# Altium PCB LKS_Motor_0331.PcbDoc (part 1 of 3)
Units mm, origin at the board's own origin, x right, y up, seen from the top; angles counter-clockwise.
Board outline 117 x 10 mm, 2 copper layers (Top Layer, Bottom Layer); 110 components, 71 nets, 323 pads, 187 vias.
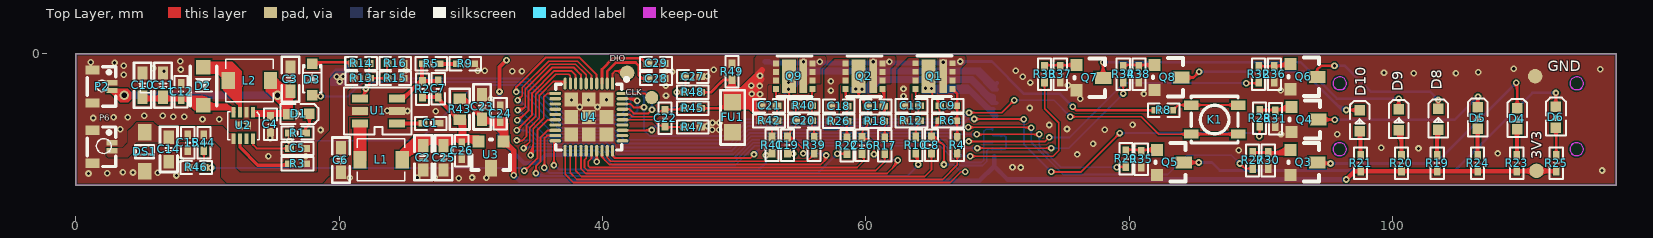
[diagram p0: Top Layer view]
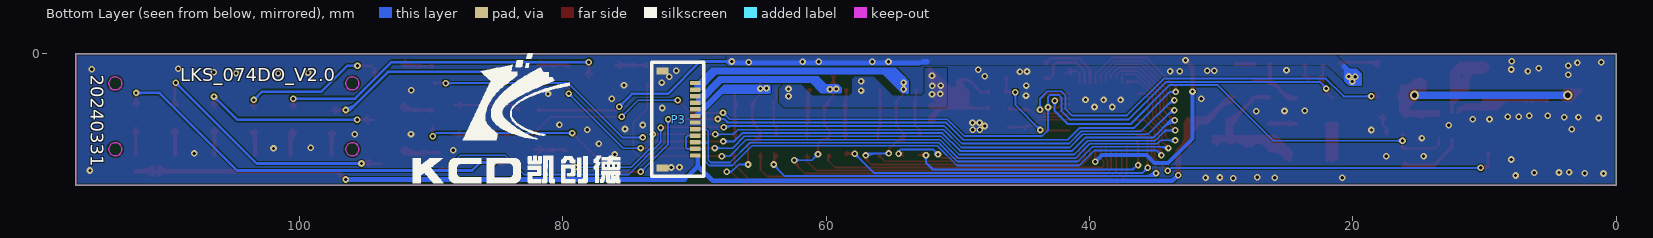
[diagram p1: Bottom Layer view, seen from below]
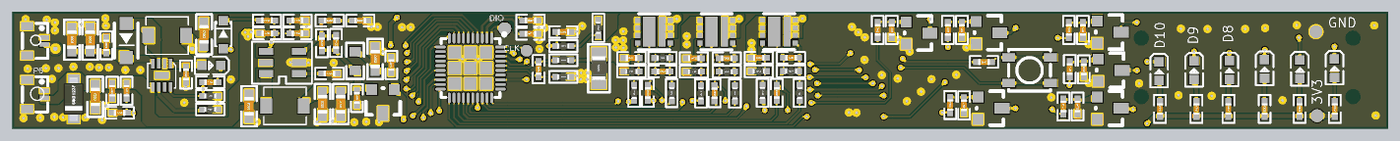
[diagram p4: 3D render of the assembled board from above, using the file's embedded part models]

## Layer stack, top to bottom
Top Solder: solder mask 0.0102, Solder Resist, Dk 3.5
Top Layer: signal copper 0.0356
Dielectric1: core 0.32, FR-4, Dk 4.8
Bottom Layer: signal copper 0.0356
Bottom Solder: solder mask 0.0102, Solder Resist, Dk 3.5

## Board outline
0,-10 0,0 117,0 117,-10

## Design rules (kind name [scope] priority, off if disabled: settings)
Clearance [All] p1: gap=0.1 ignorepadtopadclearanceinfootprint=FALSE except(0: Arc-Hole Track-Hole SMDPad-Hole THPad-Hole Via-Hole Fill-Hole Poly-Hole Region-Hole Text-Hole)
ComponentClearance [All] p1 off: gap=0.254 collisioncheckmode=3 verticalgap=0.254 showdistances=FALSE
FabricationTestpoint [(IsPad And (OnTopLayer Or OnBottomLayer))] p1: side=3 testpointundercomponent=TRUE minsize=1.016 maxsize=2.54 preferedsize=1.524 minholesize=0 maxholesize=1.016 preferedholesize=0.813 testpointgrid=0.025 allowsidetop=TRUE allowsidebottom=TRUE usegrid=TRUE gridtolerance=0
HoleSize [All] p1: absolutevalues=TRUE maxlimit=5.08 minlimit=0.025 maxpercent=80.000 minpercent=20.000
HoleToHoleClearance [All] p1: gap=0.127 allowstackedmicrovias=TRUE
MinimumSolderMaskSliver [All] p1 off: minsoldermaskwidth=0.127
PlaneClearance [All] p1: clearance=0.178
PlaneConnect [All] p1: planeconnectstyle=Direct reliefexpansion=0.508 reliefentries=4 reliefconductorwidth=0.254 reliefairgap=0.254
PolygonConnect [All] p1: connectstyle=Direct reliefconductorwidth=0.254 reliefentries=4 polygonreliefangle="90 Angle" airgapwidth=0.254
RoutingVias [All] p1: holewidth=0.457 width=0.762 viastyle="Through Hole" minholewidth=0.2 minwidth=0.5 maxholewidth=1 maxwidth=2
SilkToSilkClearance [All] p1 off: silktosilkclearance=0
SilkToSolderMaskClearance SilkscreenOverComponentPads [IsPad] p1 off: minsilkscreentomaskgap=0.127 clearancetoexposedcopper=TRUE
SolderMaskExpansion [All] p1: expansion=0.102 istentingtop=FALSE
Width [All] p1: maxlimit=2.54 minlimit=0.127 preferedwidth=0.203
21 further rules are at their usual default settings.

## Components (designator, comment, footprint, x,y, rotation, side; value= is the part's Value field where it differs from the comment)
3V3 "test" piot#1 110.947,-8.89 r0 top
C1 "1uF/16V" "C 0402_M" 26.975,-5.283 r180 top
C2 "10uF/16V" "C 0603_M" 26.391,-7.899 r90 top
C3 "22uF/25V" "C 0603_M" 16.307,-1.93 r270 top
C4 "1uF/25V" "C 0402_M" 14.783,-5.359 r270 top
C5 "103" "R 0402_M" 16.84,-7.188 r180 top
C6 "10uF/16V" "C 0603_M" 20.142,-8.077 r90 top
C7 "10pF/16V" "C 0402_M" 27.534,-2.667 r270 top
C8 "4.7uF/25V" "C 0402_M" 64.999,-6.934 r270 top
C9 "1nF" "C 0402_M" 66.221,-3.943 r0 top
C10 "22uF/25V" "C 0603_M" 5.08,-2.388 r270 top
C11 "22uF/25V" "C 0603_M" 6.629,-2.388 r270 top
C12 "4.7uF/25V" "C 0402_M" 8.001,-2.87 r270 top
C13 "1nF" "C 0402_M" 63.475,-3.943 r0 top
C14 "22uF/25V" "C 0603_M" 7.061,-7.264 r90 top
C15 "1uF/25V" "C 0402_M" 8.509,-6.756 r90 top
C16 "4.7uF/25V" "C 0402_M" 59.715,-6.96 r270 top
C17 "1nF" "C 0402_M" 60.755,-3.978 r0 top
C18 "1nF" "C 0402_M" 57.961,-3.978 r0 top
C19 "4.7uF/25V" "C 0402_M" 54.051,-6.934 r270 top
C20 "1nF" "C 0402_M" 55.294,-5.096 r0 top
C21 "1nF" "C 0402_M" 52.653,-3.953 r0 top
C22 "NC" "C 0402_M" 44.755,-4.902 r90 top
C23 "10uF/10V" "C 0603_M" 30.861,-4.039 r270 top
C24 "100nF" "C 0402_M" 32.233,-4.547 r90 top
C25 "10uF/10V" "C 0603_M" 27.94,-7.899 r90 top
C26 "100nF/10V" "C 0402_M" 29.312,-7.366 r270 top
C27 "1nF/50V" "C 0402_M" 46.863,-1.727 r180 top
C28 "100nF/50V" "C 0402_M" 44.069,-1.88 r0 top
C29 "1uF/10V" "C 0402_M" 44.069,-0.737 r180 top
CLK "test" piot#2 43.739,-3.327 r0 top
D1 "LED_R" 0603-LED 17.018,-4.648 r180 top
D2 "SS34" SOD123FL 9.703,-2.235 r270 top
D3 "4148" SOD-323 17.958,-1.956 r270 top
D4 "LED_R" 0603-LED 109.55,-4.851 r270 top
D5 "LED_R" 0603-LED 106.553,-4.801 r270 top
D6 "LED_R" 0603-LED 112.497,-4.75 r270 top
D8 "LED_R" 0603-LED 103.556,-4.902 r270 top
D9 "LED_R" 0603-LED 100.559,-4.928 r270 top
D10 "LED_R" 0603-LED 97.587,-5.004 r270 top
DIO "test" piot#1 41.885,-1.448 r0 top
DS1 "SMF12CA-MS" SOD-123F 5.232,-7.442 r90 top
FU1 "0.05R" "R 0805_M" 49.886,-4.826 r90 top
GND "test" piot#1 110.846,-1.702 r0 top
K1 "K1" SMD3.3X3.3X2 86.5,-5 r0 top
L1 "6.8uH" "SMD3.5X3 .2- duplicate" 23.19,-8.052 r0 top
L2 "4.7uH" "SMD3.5X3 .2- duplicate" 13.183,-2.032 r0 top
P2 "Header 2" CONN_SMD_2P_0.6 1.88,-2.515 r270 top
P3 "Header 12" SMD-12 69.952,-7.722 r90 bottom
P6 "Header 2" CONN_SMD_2P_0.6 1.88,-7.087 r270 top
Q1 "CJBM3020" DFN-3X3_8 66.577,-2.672 r90 top
Q2 "CJBM3020" DFN-3X3_8 61.263,-2.681 r90 top
Q3 "J3Y" SOT-23 92.253,-7.29 r270 top
Q4 "J3Y" SOT-23 92.329,-4.039 r270 top
Q5 "J3Y" SOT-23 82.118,-7.29 r270 top
Q6 "J3Y" SOT-23 92.253,-0.787 r270 top
Q7 "J3Y" SOT-23 75.997,-0.864 r270 top
Q8 "J3Y" SOT-23 81.94,-0.838 r270 top
Q9 "CJBM3020" DFN-3X3_8 55.955,-2.681 r90 top
R1 "4.7K" "C 0402_M" 16.84,-6.02 r0 top
R2 "2.5M" "C 0402_M" 26.34,-2.692 r90 top
R3 "510" "R 0402_M" 16.84,-8.357 r0 top
R4 "10R" "R 0402_M" 66.953,-6.94 r270 top
R5 "340K" "C 0402_M" 27,-0.762 r0 top
R6 "10K" "R 0402_M" 66.221,-5.086 r180 top
R8 "200K" "C 0402_M" 82.626,-4.293 r180 top
R9 "0" "C 0402_M" 29.591,-0.762 r0 top
R10 "10R" "R 0402_M" 63.805,-6.934 r270 top
R12 "10K" "R 0402_M" 63.475,-5.086 r180 top
R13 "1.5M/NC" "C 0402_M" 21.692,-1.854 r0 top
R14 "1K" "C 0402_M" 21.666,-0.737 r0 top
R15 "100K" "C 0402_M" 24.257,-1.854 r180 top
R16 "100K" "C 0402_M" 24.257,-0.737 r0 top
R17 "10R" "R 0402_M" 61.443,-6.975 r270 top
R18 "10K" "R 0402_M" 60.755,-5.121 r180 top
R19 "1K" "C 0402_M" 103.403,-8.306 r270 top
R20 "1K" "C 0402_M" 100.686,-8.306 r270 top
R21 "1K" "C 0402_M" 97.587,-8.306 r270 top
R22 "10R" "R 0402_M" 58.571,-6.975 r270 top
R23 "1K" "C 0402_M" 109.449,-8.306 r270 top
R24 "1K" "C 0402_M" 106.477,-8.306 r270 top
R25 "1K" "C 0402_M" 112.446,-8.306 r270 top
R26 "10K" "R 0402_M" 57.961,-5.121 r180 top
R27 "10K" "C 0402_M" 89.383,-8.103 r270 top
R28 "10K" "C 0402_M" 89.916,-4.902 r270 top
R29 "10K" "C 0402_M" 79.756,-7.976 r270 top
R30 "100K" "C 0402_M" 90.576,-8.103 r270 top
R31 "100K" "C 0402_M" 91.11,-4.928 r270 top
R32 "10K" "C 0402_M" 89.84,-1.549 r270 top
R33 "10K" "C 0402_M" 73.584,-1.549 r270 top
R34 "10K" "C 0402_M" 79.553,-1.549 r270 top
R35 "100K" "C 0402_M" 80.924,-8.001 r270 top
R36 "100K" "C 0402_M" 91.034,-1.549 r270 top
R37 "100K" "C 0402_M" 74.778,-1.549 r270 top
R38 "100K" "C 0402_M" 80.747,-1.549 r270 top
R39 "10R" "R 0402_M" 56.082,-6.95 r270 top
R40 "10K" "R 0402_M" 55.294,-3.953 r180 top
R41 "10R" "R 0402_M" 52.883,-6.934 r270 top
R42 "10K" "R 0402_M" 52.653,-5.096 r180 top
R43 "0R/NC" 0603 29.159,-4.216 r90 top
R44 "2M" "C 0402_M" 9.728,-6.756 r270 top
R45 "1K1%" "R 0402_M" 46.863,-4.14 r180 top
R46 "470K" "C 0402_M" 9.144,-8.636 r180 top
R47 "1K1%" "R 0402_M" 46.863,-5.563 r180 top
R48 "1K" "R 0402_M" 46.863,-2.921 r180 top
R49 "10R" "R 0402_M" 49.835,-1.372 r90 top
U1 "CS5503R" SOT23-6L 23.038,-4.394 r180 top
U2 "CS5090EL" DFN2X2_8_0.5 12.725,-5.436 r180 top
U3 "CJ6376A33MY" SOT-23 32.487,-6.655 r180 top
U4 "LKS32MC074DOF8Q8" QFN40 38.989,-4.801 r270 top

## Footprints (in the part's own frame and the unit in brackets; to place one, negate y for a bottom-side part, rotate by r counter-clockwise, add the part's x,y. Pads: shape width x height; smd on the part's side, far side on the other; paste and mask are expansions set on the pad)
0603 [mm]
  rect 0.8x0.955 smd: 1(-0.795,0) 2(0.795,0)
  silkscreen extent -1.53,-0.75 1.56,0.75
0603-LED [mm]
  rect 0.8x0.8 smd: 1(0.876,-0.073) 2(-0.723,-0.08)
  silkscreen extent -1.41,-0.82 1.47,0.68
"C 0402_M" [mil] "无极性贴片电容"
  rect 26x20 smd: 1(-24,0) 2(24,0)
  silkscreen extent -47,-20 47,20, body extent -20,-10 20,10, height 21
"C 0603_M" [mil] "无极性贴片电容"
  rect 40x30 smd: 1(-36.5,0) 2(36.5,0)
  silkscreen extent -68,-26 68,26, body extent -31,-16 31,16, height 32
CONN_SMD_2P_0.6 [mm]
  rect 0.4x0.8 smd: 1(-0.324,0.871) 2(0.276,0.871)
  rect 0.7x1.05 smd: 3(1.226,-0.604) 4(-1.274,-0.604)
  silkscreen extent -1.52,-1.01 1.48,1.15
DFN2X2_8_0.5 [mm]
  rect 0.3x0.8 smd: 1(-0.75,-1) 2(-0.25,-1) 3(0.25,-1) 4(0.75,-1) 5(0.75,1) 6(0.25,1) 7(-0.25,1) 8(-0.75,1)
  rect 1.2x0.6 smd: 9(0,0)
  silkscreen extent -1.19,-1.02 1.2,1.08
DFN-3X3_8 [mil]
  rect 17x18 smd: 1(0,0) 2(25.59,0) 3(51.18,0) 4(76.77,0) 5(76.77,109.58) 6(51.18,109.58) 7(25.59,109.58) 8(0,109.58)
  rect 100x23 smd: 9(38.33,27.5)
  rect 100x42 smd: 10(38.33,70.83)
  silkscreen extent -23,2 99,106
piot#1 [mm]
  round 1.1 smd: 1(0,0)
piot#2 [mm]
  round 1 smd: 1(0,0)
QFN40 [mm]
  rect 1.05x1.05 smd: 0(-1.32,-1.352) 0(-1.32,1.308) 0(-1.32,-0.022) 0(0.01,-0.022) 0(0.01,1.308) 0(0.01,-1.352) 0(1.34,-0.022) 0(1.34,-1.352) 0(1.34,1.308)
  rect 0.9x0.24 smd: 1(-2.54,1.778)
  oval 0.9x0.24 smd: 2(-2.54,1.378) 3(-2.54,0.978) 4(-2.54,0.578) 5(-2.54,0.178) 6(-2.54,-0.222) 7(-2.54,-0.622) 8(-2.54,-1.022) 9(-2.54,-1.422) 10(-2.54,-1.822) 21(2.56,-1.822) 22(2.56,-1.422) 23(2.56,-1.022) 24(2.56,-0.622) 25(2.56,-0.222) 26(2.56,0.178) 27(2.56,0.578) 28(2.56,0.978) 29(2.56,1.378) 30(2.56,1.778)
  oval 0.24x0.9 smd: 11(-1.79,-2.572) 12(-1.39,-2.572) 13(-0.99,-2.572) 14(-0.59,-2.572) 15(-0.19,-2.572) 16(0.21,-2.572) 17(0.61,-2.572) 18(1.01,-2.572) 19(1.41,-2.572) 20(1.81,-2.572) 31(1.81,2.528) 32(1.41,2.528) 33(1.01,2.528) 34(0.61,2.528) 35(0.21,2.528) 36(-0.19,2.528) 37(-0.59,2.528) 38(-0.99,2.528) 39(-1.39,2.528) 40(-1.79,2.528)
  silkscreen extent -2.98,-2.52 2.51,2.97
"R 0402_M" [mil] "1/16W贴片电阻"
  rect 26x20 smd: 1(-24,0) 2(24,0)
  silkscreen extent -47,-20 47,20, body extent -20,-10 20,10, height 12
"R 0805_M" [mil] "1/8W贴片电阻"
  rect 50x50 smd: 1(-45,0) 2(45,0)
  silkscreen extent -81,-36 81,36, body extent -39,-25 39,25, height 20
SMD3.3X3.3X2 [mm]
  rect 1.1x0.7 smd: 1(-1.775,1.1) 1(1.775,1.1) 2(-1.775,-1.1) 2(1.775,-1.1)
  silkscreen extent -1.78,-1.78 1.78,1.78
"SMD3.5X3 .2- duplicate" [mm]
  rect 1x1.3 smd: 1(-1.6,0) 2(1.6,0)
  silkscreen extent -1.8,-1.6 1.8,1.6
SMD-12 [mil]
  rect 22x36 smd: 0(252.38,97.5) 0/2(-37.62,97.5)
  rect 13x32 smd: 1(216.53,0) 2(196.85,0) 3(177.17,0) 4(157.48,0) 5(137.79,0) 6(118.11,0) 7(98.42,0) 8(78.74,0) 9(59.05,0) 10(39.37,0) 11(19.69,0) 12(0,0)
  silkscreen extent -62,-25 279,130
SOD123FL [mm]
  rect 1.1x1.1 smd: 1(-1.228,-0.006) 2(1.673,-0.006)
  silkscreen extent -1.28,-1.01 1.72,0.99
SOD-123F [mm]
  rect 1.25x1 smd: 1(1.475,0) 2(-1.475,0)
  silkscreen extent -0.5,-0.7 0.5,0.7, body extent -1.9,-0.85 1.85,0.85, height 1.2
SOD-323 [mm]
  rect 0.8x0.8 smd: 1(1.2,0) 2(-1.2,0)
  silkscreen extent -1.1,-0.7 1,0.7
SOT23-6L [mm]
  rect 1.2x0.6 smd: 1(-1.349,0.899) 2(-1.349,-0.051) 3(-1.349,-1.001) 4(1.451,-1.001) 5(1.451,-0.051) 6(1.451,0.899)
  silkscreen extent -2.45,-1.85 2.65,1.75
SOT-23 [mil]
  rect 36x36 smd: 1(0,0) 2(75,0)
  rect 36x50 smd: 3(38,80)
  silkscreen extent -20,-5 95,85

## Part data
C1 C4 C24: library part CAP
C2 C3 C5 C6 C7 C8 C9 C10 C11 C12 C13 C14 C15 C16 C17 C18 C19 C20 C21 C22 C23 C25 C26: library part CAP, "Capacitor"
C27 C28 C29: library part C, "Capacitor"
D1 D4 D5 D6 D8 D9 D10: library part LED
D2 D3: library part Diode, "Default Diode"
DS1: library part DIODE-3, "12V/19.9V"
FU1 R4 R6 R10 R12 R17 R18 R22 R26 R39 R40 R41 R42 R45 R47 R48 R49: library part RAS
L1 L2: library part Inductor, "Inductor"
P2 P6: "Header, 2-Pin"
P3: "Header, 12-Pin"
Q3 Q4 Q5 Q6 Q7 Q8: library part NPN, "NPN Transistor"
R1 R2 R3 R5 R8 R9 R13 R14 R15 R16 R19 R20 R21 R23 R24 R25 R27 R28 R29 R30 R31 R32 R33 R34 R35 R36 R37 R38 R43 R44 R46: library part RES2_S
U3: library part 78L15
U4: library part LKS32MC074DF8Q8, "芯片"

## Via types
v1: diameter 0.5, hole 0.25, Top Layer to Bottom Layer, 185 vias
v2: diameter 0.7, hole 0.4, Top Layer to Bottom Layer, 2 vias

## Nets (pads, with @x,y where several pads share a name; then routed paths per layer and width w, separated by ;. In a path a pad name is that pad's centre, name@x,y a point inside that pad or via, vN(x,y) a via of type N, cw(c..) or ccw(c..) an arc to the next point about the centre after c; other vN are vias at no path point)
1ST: R29.2 U4.6 | length 65.6
  Top Layer w0.127: v1@33.528,-4.355 ccw(c33.644,-4.065) 33.865,-4.286 ; v1(33.553,-4.293) 33.858,-4.293 34.138,-4.013 ; v1@33.575,-4.237 ccw(c33.722,-3.87) 34.001,-4.15 ; v1@33.622,-4.119 ccw(c33.799,-3.675) 34.138,-4.013 ; U4.6@38.727,-1.891 ccw(c38.631,-1.794) 38.767,-1.794 ccw(c38.903,-1.794) U4.6@38.807,-1.891 ; U4.6@38.767,-2.108 38.767,-1.6 37.954,-0.787 36.043,-0.787 34.138,-2.692 34.138,-4.013 ; v1(68.428,-6.121) v1(73.177,-6.121) ; v1@68.559,-6.253 cw(c68.878,-6.572) 68.878,-6.121 cw(c68.878,-5.671) v1@68.559,-5.99 ; v1@73.046,-6.253 ccw(c72.727,-6.572) 72.727,-6.121 ccw(c72.727,-5.671) v1@73.046,-5.99 ; v1@79.096,-8.585 R29.2@79.756,-8.585 ; v1@79.202,-8.742 cw(c79.582,-9.122) R29.2@79.582,-8.585 ; v1@79.202,-8.479 ccw(c79.459,-8.222) 79.459,-8.585 ; R29.2@79.621,-8.72 ccw(c79.296,-9.045) 79.296,-8.585 ccw(c79.296,-8.125) R29.2@79.621,-8.45
  Bottom Layer w0.127: v1@33.553,-4.479 cw(c33.553,-5.359) 34.175,-4.737 ; v1@33.553,-4.352 cw(c33.553,-4.925) 33.958,-4.52 ; v1(33.553,-4.293) 33.731,-4.293 35.56,-6.121 40.513,-6.121 41.504,-7.112 49.733,-7.112 51.079,-5.766 66.7,-5.766 67.056,-6.121 v1(68.428,-6.121) ; v1@68.296,-6.253 ccw(c67.977,-6.572) 67.977,-6.121 ccw(c67.977,-5.671) v1@68.296,-5.99 ; v1@73.046,-6.253 cw(c72.727,-6.572) 73.177,-6.572 cw(c73.628,-6.572) v1@73.309,-6.253 ; v1(73.177,-6.121) 73.177,-6.985 74.803,-8.611 v1(79.07,-8.611) ; v1@78.938,-8.742 ccw(c78.62,-9.061) 78.62,-8.611 ccw(c78.62,-8.16) v1@78.938,-8.479
2ND: R27.2 U4.5 | length 76.4
  Top Layer w0.127: v1(33.553,-3.531) 33.909,-3.175 33.909,-2.565 35.916,-0.559 38.1,-0.559 39.167,-1.626 U4.5@39.167,-2.108 ; v1@33.553,-3.344 ccw(c33.553,-2.894) 33.872,-3.212 ccw(c34.19,-3.531) v1@33.74,-3.531 ; U4.5@39.127,-1.891 ccw(c39.031,-1.794) 39.167,-1.794 ccw(c39.303,-1.794) U4.5@39.207,-1.891 ; v1(67.793,-5.588) 72.542,-5.588 v1(72.568,-5.613) ; v1@67.924,-5.72 cw(c68.243,-6.038) 68.243,-5.588 cw(c68.243,-5.138) v1@67.924,-5.456 ; 72.056,-5.588 cw(c72.056,-6.125) v1@72.436,-5.745 ; 72.179,-5.588 ccw(c72.179,-5.224) v1@72.436,-5.482 ; v1@88.417,-8.518 cw(c88.417,-8.968) 88.736,-8.65 cw(c89.054,-8.331) v1@88.604,-8.331 ; v1(88.417,-8.331) 88.824,-8.738 89.357,-8.738 R27.2@89.383,-8.712 ; 88.861,-8.738 ccw(c88.861,-8.191) R27.2@89.248,-8.578 ; 88.984,-8.738 cw(c88.984,-9.111) R27.2@89.248,-8.847
  Bottom Layer w0.127: v1@33.553,-3.717 cw(c33.553,-4.597) 34.175,-3.975 ; v1@33.553,-3.59 cw(c33.553,-4.163) 33.958,-3.758 ; v1(33.553,-3.531) 33.731,-3.531 36.093,-5.893 40.64,-5.893 41.554,-6.807 49.708,-6.807 51.029,-5.486 67.691,-5.486 v1(67.793,-5.588) ; 67.097,-5.486 cw(c67.097,-6.284) v1@67.661,-5.72 ; 67.404,-5.486 cw(c67.404,-5.977) v1@67.751,-5.63 ; v1@72.436,-5.745 cw(c72.118,-6.064) 72.568,-6.064 cw(c73.018,-6.064) v1@72.7,-5.745 ; v1(72.568,-5.613) 72.568,-6.731 75.006,-9.169 82.931,-9.169 84.404,-7.696 87.782,-7.696 v1(88.417,-8.331) ; v1@88.231,-8.331 ccw(c87.781,-8.331) 88.099,-8.013 ccw(c88.417,-7.694) v1@88.417,-8.145
3RD: R28.2 U4.4 | length 80
  Top Layer w0.15: v1@33.345,-2.757 ccw(c33.178,-2.54) 33.452,-2.54 ; v1@33.401,-2.845 v1(33.452,-2.896) 33.452,-2.54 ; v1@33.559,-2.757 cw(c33.726,-2.54) 33.452,-2.54 ; U4.4@39.567,-2.261 39.567,-1.594 38.252,-0.279 35.712,-0.279 33.452,-2.54 ; v1(68.25,-4.953) 71.984,-4.953 v1(72.009,-4.978) v1@72.034,-5.004 ; v1@68.374,-5.077 cw(c68.672,-5.375) 68.672,-4.953 cw(c68.672,-4.531) v1@68.374,-4.829 ; 71.525,-4.953 cw(c71.525,-5.462) v1@71.885,-5.102 ; 71.648,-4.953 ccw(c71.648,-4.617) v1@71.885,-4.855 ; v1(74.092,-8.966) 76.352,-8.966 v1(79.299,-6.02) ; v1@74.216,-9.09 cw(c74.514,-9.389) 74.514,-8.966 cw(c74.514,-8.544) v1@74.216,-8.842 ; v1@79.124,-6.02 cw(c78.701,-6.02) 79,-6.319 cw(c79.299,-6.617) v1@79.299,-6.195 ; v1@89.767,-6.15 ccw(c89.407,-5.79) R28.2@89.916,-5.79 ; R28.2@89.789,-5.715 cw(c89.484,-6.02) 89.916,-6.02 cw(c90.348,-6.02) R28.2@90.043,-5.715 ; v1@89.916,-6.248 R28.2@89.916,-5.512 ; 89.916,-5.913 ccw(c90.252,-5.913) v1@90.014,-6.15
  Bottom Layer w0.15: v1(33.452,-2.896) 33.909,-2.896 36.652,-5.639 40.767,-5.639 41.656,-6.528 49.606,-6.528 50.902,-5.232 67.462,-5.232 67.742,-4.953 v1(68.25,-4.953) ; v1@33.576,-3.019 cw(c33.874,-3.318) 33.874,-2.896 cw(c33.874,-2.473) v1@33.576,-2.772 ; v1@68.126,-5.077 ccw(c67.827,-5.375) 67.827,-4.953 ccw(c67.827,-4.531) v1@68.126,-4.829 ; v1@71.885,-5.102 cw(c71.587,-5.401) 72.009,-5.401 cw(c72.431,-5.401) v1@72.133,-5.102 ; v1(72.009,-4.978) 72.009,-6.883 v1(74.092,-8.966) ; v1@73.917,-8.966 ccw(c73.494,-8.966) 73.793,-8.667 ccw(c74.092,-8.369) v1@74.092,-8.791 ; v1(79.299,-6.02) 89.637,-6.02 v1(89.891,-6.274) ; v1@79.423,-6.144 cw(c79.721,-6.442) 79.721,-6.02 cw(c79.721,-5.597) v1@79.423,-5.896
+3.3V: 3V3.1 C23.2 C24.1 P3.12 R19.2 R20.2 R21.2 R23.2 R24.2 R25.2 R43.2 U3.1 | length 105.8
  Top Layer w0.3: U3.1@32.385,-6.477 U3.1@32.487,-6.579
  Top Layer w0.35: v1(96.495,-9.55) 97.13,-8.915 R21.2@97.587,-8.915 R19.2@103.403,-8.915 R25.2@112.446,-8.915 ; 109.981,-8.915 ccw(c109.981,-7.923) 3V3.1@110.682,-8.625 ; 110.103,-8.915 cw(c110.103,-9.734) 3V3.1@110.682,-9.155 ; 3V3.1@111.212,-9.155 cw(c111.791,-9.734) 111.791,-8.915 ; 3V3.1@111.212,-8.625 ccw(c111.914,-7.923) 111.914,-8.915
  Top Layer w0.4: R43.2@29.21,-3.294 29.342,-3.294 C23.2@30.886,-4.839 ; R43.2@29.237,-3.621 cw(c29.237,-4.665) 29.975,-3.927 ; C23.2@30.534,-4.486 cw(c30.182,-4.839) C23.2@30.68,-4.839 ; C23.2@30.595,-4.548 ccw(c30.861,-4.282) C23.2@30.861,-4.658 ; C23.2@30.989,-5.094 cw(c31.298,-5.403) 31.298,-4.966 cw(c31.298,-4.529) C23.2@30.989,-4.838 ; C23.2@30.989,-4.965 ccw(c31.451,-4.502) 31.451,-5.156 ; 31.598,-5.156 31.598,-5.182 32.385,-5.969 ; 31.826,-4.966 cw(c31.826,-5.486) C24.1@32.194,-5.118 ; C24.1@32.203,-5.277 cw(c31.973,-5.619) 32.385,-5.619 ; C24.1@32.227,-5.286 cw(c32.171,-5.776) 32.664,-5.776 ; C24.1@32.233,-5.286 cw(c32.233,-5.662) 32.498,-5.396 ; U3.1@32.305,-6.473 ccw(c31.436,-5.605) 32.664,-5.605 ; U3.1@32.385,-6.477 32.385,-5.969 ; 32.385,-5.731 ccw(c31.734,-5.731) 32.194,-5.271 cw(c31.06,-6.405) U3.1@32.664,-6.405 ; C24.1@32.477,-4.988 cw(c32.025,-5.44) 32.664,-5.44 ; U3.1@32.487,-6.912 cw(c32.487,-7.717) 33.056,-7.148 ; U3.1@32.487,-6.655 32.664,-6.477 32.664,-5.563 32.067,-4.966 30.886,-4.966 31.077,-5.156 31.953,-5.156 32.385,-5.588 32.385,-5.969 ; U3.1@32.487,-6.579 33.274,-7.366 v1(33.274,-9.22) ; U3.1@32.633,-6.444 cw(c32.963,-5.969) 32.385,-5.969 ; U3.1@32.744,-6.655 ccw(c33.181,-6.655) U3.1@32.872,-6.964
  Bottom Layer w0.35: v1(33.274,-9.22) 33.706,-9.652 68.631,-9.652 69.748,-8.534 ; P3.12@69.748,-7.772 69.748,-8.534 ; v1(96.495,-9.55) 70.764,-9.55 69.748,-8.534
BAT_ADC: R44.2 R46.1 U4.16 | length 38.3
  Top Layer w0.15: R44.2@9.602,-7.569 cw(c9.296,-7.874) 9.728,-7.874 cw(c10.16,-7.874) R44.2@9.855,-7.569 ; R46.1@9.627,-8.509 ccw(c9.383,-8.265) 9.728,-8.265 ; 9.728,-8.143 ccw(c10.247,-8.143) R46.1@9.88,-8.509 ; R44.2@9.728,-7.366 9.728,-8.611 R46.1@9.754,-8.636 v1@10.262,-8.636 ; R46.1@9.803,-8.636 cw(c9.803,-9.145) v1@10.163,-8.785 ; R46.1@9.926,-8.636 ccw(c9.926,-8.3) v1@10.163,-8.538 ; R46.1@9.956,-8.762 cw(c10.262,-9.067) v1@10.262,-8.636 ; R46.1@9.956,-8.51 ccw(c10.262,-8.205) v1@10.262,-8.636 ; v1(10.287,-8.661) v1@10.262,-8.636 ; v1(34.061,-8.89) 34.112,-8.89 35.052,-7.95 35.052,-5.817 35.858,-5.011 U4.16@36.417,-5.011 ; v1@34.061,-8.715 ccw(c34.061,-8.17) 34.447,-8.555 ; v1@34.236,-8.89 cw(c34.536,-8.89) 34.324,-8.678
  Bottom Layer w0.15: v1(10.287,-8.661) 21.057,-8.661 ; v1@10.411,-8.785 cw(c10.709,-9.084) 10.709,-8.661 cw(c10.709,-8.239) v1@10.411,-8.538 ; 24.384,-8.661 21.057,-8.661 ; v1(34.061,-8.89) 34.011,-8.89 33.782,-8.661 21.057,-8.661
BLUE: R32.2 U4.7 | length 74.5
  Top Layer w0.15: v1(33.528,-5.055) 33.63,-5.055 34.392,-4.293 34.392,-2.845 36.195,-1.041 37.834,-1.041 38.367,-1.575 U4.7@38.367,-1.854 ; v1@33.528,-4.88 ccw(c33.528,-4.212) 34,-4.684 ; v1@33.703,-5.055 cw(c33.88,-5.055) 33.755,-4.929 ; v1(67.818,-6.655) 73.635,-6.655 v1(73.939,-6.35) ; v1@67.942,-6.779 cw(c68.24,-7.077) 68.24,-6.655 cw(c68.24,-6.232) v1@67.942,-6.531 ; v1(88.9,-2.235) 89.764,-2.235 R32.2@89.84,-2.159 ; v1@89.024,-2.359 cw(c89.322,-2.658) 89.322,-2.235 cw(c89.322,-1.813) v1@89.024,-2.111 ; R32.2@89.713,-2.362 ccw(c89.408,-2.667) 89.408,-2.235 ccw(c89.408,-1.803) R32.2@89.713,-2.109
  Bottom Layer w0.15: v1@33.528,-5.23 cw(c33.528,-6.449) 34.39,-5.587 ; v1@33.528,-5.08 cw(c33.528,-5.937) 34.134,-5.331 ; v1(33.528,-5.055) 33.604,-4.978 33.782,-4.978 35.166,-6.363 40.323,-6.363 41.326,-7.366 49.835,-7.366 51.181,-6.02 66.37,-6.02 67.005,-6.655 v1(67.818,-6.655) ; v1@33.528,-4.93 cw(c33.528,-5.425) 33.878,-5.075 ; v1@67.694,-6.779 ccw(c67.396,-7.077) 67.396,-6.655 ccw(c67.396,-6.232) v1@67.694,-6.531 ; v1(73.939,-6.35) 75.489,-6.35 79.604,-2.235 v1(88.9,-2.235) ; v1@74.063,-6.474 cw(c74.362,-6.772) 74.362,-6.35 cw(c74.362,-5.928) v1@74.063,-6.226 ; v1@88.776,-2.359 ccw(c88.478,-2.658) 88.478,-2.235 ccw(c88.478,-1.813) v1@88.776,-2.111
BUTTON: K1.2 R13.2 R14.2 R15.2 R16.1 U1.4 U4.38 | length 100.8
  Top Layer w0.127: v1(67.843,-4.47) 70.333,-4.47 v1(71.272,-3.531) ; v1@67.975,-4.602 cw(c68.294,-4.921) 68.294,-4.47 cw(c68.294,-4.02) v1@67.975,-4.339 ; v1@71.086,-3.531 cw(c70.636,-3.531) 70.954,-3.849 cw(c71.272,-4.167) v1@71.272,-3.717 ; v1(75.54,-4.775) 80.924,-4.775 82.249,-6.1 K1.2@84.725,-6.1 ; v1@75.671,-4.907 cw(c75.99,-5.225) 75.99,-4.775 cw(c75.99,-4.325) v1@75.671,-4.643 ; K1.2@84.322,-6.303 ccw(c83.833,-6.792) 83.833,-6.1 ccw(c83.833,-5.408) K1.2@84.322,-5.897 ; K1.2@84.412,-6.213 ccw(c84.14,-6.485) 84.14,-6.1 ccw(c84.14,-5.715) K1.2@84.412,-5.987
  Top Layer w0.15: U1.4@21.511,-3.393 21.92,-2.984 21.92,-2.642 22.276,-2.286 ; U1.4@21.587,-3.393 22.022,-2.959 v1@22.022,-2.743 ; U1.4@21.746,-3.235 ccw(c21.393,-2.883) v1@21.858,-2.704 ; 21.909,-3.071 ccw(c21.629,-2.792) v1@21.998,-2.651 ; v1(22.022,-2.642) v1@22.022,-2.743 ; v1@22.022,-2.467 ccw(c22.022,-2.289) 22.147,-2.415 ; 22.072,-2.908 ccw(c21.866,-2.701) v1@22.139,-2.597 ; R14.2@22.149,-0.863 cw(c21.844,-1.169) 22.276,-1.169 cw(c22.708,-1.169) R14.2@22.402,-0.863 ; R13.2@22.175,-1.981 cw(c21.93,-2.225) 22.276,-2.225 ; R13.2@22.175,-1.728 ccw(c21.93,-1.483) 22.276,-1.483 ; R13.2@22.18,-1.986 cw(c21.929,-2.261) 22.301,-2.261 ; v1@22.191,-2.597 cw(c22.505,-2.516) 22.276,-2.286 ; 22.276,-1.361 ccw(c22.795,-1.361) R13.2@22.428,-1.728 ; R14.2@22.276,-0.737 R13.2@22.276,-1.829 ; R13.2@22.415,-1.992 ccw(c22.657,-2.287) 22.276,-2.287 ; R13.2@22.422,-1.986 ccw(c22.673,-2.261) 22.301,-2.261 ; R13.2@22.504,-1.981 cw(c22.81,-2.286) 22.81,-1.854 cw(c22.81,-1.422) R13.2@22.504,-1.728 ; R15.2@23.445,-1.981 ccw(c23.139,-2.286) 23.139,-1.854 ccw(c23.139,-1.422) R15.2@23.445,-1.728 ; R15.2@23.521,-1.728 ccw(c23.215,-1.422) 23.647,-1.422 ccw(c24.08,-1.422) R15.2@23.774,-1.728 ; R16.1@23.521,-0.863 cw(c23.215,-1.169) 23.647,-1.169 cw(c24.08,-1.169) R16.1@23.774,-0.863 ; R16.1@23.647,-0.737 R15.2@23.647,-1.854 R13.2@22.301,-1.854 ; U4.38@41.517,-3.811 42.114,-3.811 42.367,-4.064 v1(43.155,-4.064) ; v1@43.031,-4.188 ccw(c42.732,-4.486) 42.732,-4.064 ccw(c42.732,-3.642) v1@43.031,-3.94 ; v1@22.022,-2.743 22.301,-2.464 22.301,-2.261 ; 22.276,-2.286 R13.2@22.276,-1.829 ; 22.276,-2.286 22.301,-2.261 ; R13.2@22.276,-1.829 R13.2@22.301,-1.854 ; 22.301,-2.261 R13.2@22.301,-1.854
  Top Layer w0.2: K1.2@84.725,-6.1 K1.2@88.275,-6.1 ; K1.2@85.102,-6.277 cw(c85.529,-6.703) 85.529,-6.1 cw(c85.529,-5.496) K1.2@85.102,-5.923 ; K1.2@87.898,-6.277 ccw(c87.471,-6.703) 87.471,-6.1 ccw(c87.471,-5.496) K1.2@87.898,-5.923
  Bottom Layer w0.127: 43.243,-5.905 43.586,-6.248 49.53,-6.248 50.8,-4.978 67.335,-4.978 v1(67.843,-4.47) ; v1@67.657,-4.47 cw(c67.207,-4.47) 67.525,-4.789 cw(c67.843,-5.107) v1@67.843,-4.657 ; v1(71.272,-3.531) 74.295,-3.531 v1(75.54,-4.775) ; v1@71.404,-3.662 cw(c71.723,-3.981) 71.723,-3.531 cw(c71.723,-3.08) v1@71.404,-3.399 ; v1@75.353,-4.775 ccw(c74.903,-4.775) 75.221,-4.457 ccw(c75.54,-4.138) v1@75.54,-4.589
  Bottom Layer w0.15: v1(22.022,-2.642) 22.53,-2.134 34.188,-2.134 37.059,-5.004 41.453,-5.004 42.139,-4.318 42.139,-3.327 42.342,-3.124 43.002,-3.124 43.155,-3.277 v1(43.155,-4.064) 43.155,-5.817 43.243,-5.905 ; v1@22.022,-2.467 ccw(c22.022,-2.044) 22.321,-2.343 ccw(c22.619,-2.642) v1@22.197,-2.642 ; v1@43.031,-4.188 cw(c42.732,-4.486) 43.155,-4.486 cw(c43.577,-4.486) v1@43.278,-4.188 ; v1@43.031,-3.94 ccw(c42.732,-3.642) 43.155,-3.642 ccw(c43.577,-3.642) v1@43.278,-3.94
CH_STAT: C5.2 R1.1 U2.8 U4.39 | length 42.5
  Top Layer w0.15: U2.8@13.422,-6.739 cw(c13.294,-6.867) 13.475,-6.867 cw(c13.656,-6.867) U2.8@13.528,-6.739 ; U2.8@13.475,-6.436 13.475,-6.922 13.741,-7.188 C5.2@16.231,-7.188 R1.1@16.231,-6.02 ; C5.2@16.028,-7.315 ccw(c15.722,-7.62) 15.722,-7.188 ccw(c15.722,-6.756) C5.2@16.028,-7.062 ; C5.2@16.104,-7.062 ccw(c15.798,-6.756) 16.231,-6.756 ccw(c16.663,-6.756) C5.2@16.357,-7.062 ; R1.1@16.104,-6.146 cw(c15.798,-6.452) 16.231,-6.452 cw(c16.663,-6.452) R1.1@16.357,-6.146 ; v1@16.107,-6.728 cw(c15.808,-7.026) 16.231,-7.026 cw(c16.653,-7.026) v1@16.354,-6.728 ; v1@16.107,-6.48 ccw(c15.808,-6.182) 16.231,-6.182 ccw(c16.653,-6.182) v1@16.354,-6.48 ; U4.39@41.517,-3.411 42.494,-3.411 v1(42.647,-3.563) ; U4.39@41.856,-3.411 cw(c41.856,-4.353) v1@42.523,-3.687 ; 42.218,-3.411 cw(c42.218,-3.991) v1@42.629,-3.581
  Bottom Layer w0.15: v1(16.231,-6.604) 26.035,-6.604 30.251,-2.388 33.934,-2.388 36.881,-5.334 41.656,-5.334 42.647,-4.343 v1(42.647,-3.563) ; v1@16.354,-6.728 cw(c16.653,-7.026) 16.653,-6.604 cw(c16.653,-6.182) v1@16.354,-6.48 ; v1@42.523,-3.687 cw(c42.224,-3.985) 42.647,-3.985 cw(c43.069,-3.985) v1@42.77,-3.687
DCDC_5V: C2.2 C7.2 C25.2 C26.1 L1.2 R2.1 R43.1 U3.2 | length 87
  Top Layer w0.3: L1.2@24.664,-7.575 ccw(c24.593,-7.392) 24.79,-7.392 ; L1.2@24.79,-7.852 ccw(c24.79,-7.215) L1.2@25.24,-7.665 ; L1.2@24.839,-7.673 cw(c26.391,-9.225) 26.391,-7.03 ccw(c26.391,-8.274) 25.511,-7.395 ; L1.2@24.84,-7.902 cw(c26.193,-7.902) 25.236,-6.945 ; L1.2@24.916,-7.575 cw(c24.987,-7.392) 24.79,-7.392 ; L1.2@24.999,-7.907 cw(c26.391,-9.298) C2.2@26.391,-7.33 ; L1.2@25.08,-7.432 cw(c24.79,-7.141) 24.79,-7.552 ccw(c24.79,-6.191) 25.752,-7.153 ; L1.2@25.237,-7.669 ccw(c25.469,-7.902) L1.2@25.14,-7.902 ; 25.351,-7.161 cw(c26.391,-8.2) 26.391,-6.73 ccw(c26.391,-7.25) C2.2@26.023,-6.882 ; 25.515,-6.997 ccw(c26.42,-7.902) L1.2@25.14,-7.902 ; 25.748,-6.433 ccw(c27.217,-7.902) L1.2@25.14,-7.902 ; 26.125,-6.325 cw(c26.125,-8.66) 27.777,-7.009 ccw(c26.769,-8.016) C2.2@26.769,-6.591 ; C2.2@26.13,-6.584 cw(c26.757,-7.212) 26.757,-6.325 ; R2.1@26.34,-3.302 26.365,-3.277 27.381,-3.277 29.235,-5.131 29.235,-6.401 ; R2.1@26.413,-3.376 cw(c26.652,-3.614) 26.652,-3.277 ; C2.2@26.566,-6.695 cw(c26.774,-6.518) 26.581,-6.325 ; 26.837,-6.591 ccw(c26.837,-7.292) 26.342,-6.797 cw(c27.481,-7.936) 27.481,-6.325 ; 26.849,-6.325 cw(c26.849,-7.936) 27.989,-6.797 ccw(c27.493,-7.292) 27.493,-6.591 ; C25.2@27.561,-6.591 ccw(c27.561,-8.016) 26.554,-7.009 cw(c28.205,-8.66) 28.205,-6.325 ; 27.574,-6.325 cw(c27.574,-7.212) C25.2@28.201,-6.584 ; C7.2@27.638,-3.353 ccw(c28.073,-3.353) 27.765,-3.66 ; 28.387,-6.591 ccw(c28.387,-7.292) C25.2@27.891,-6.797 ; 28.631,-4.526 cw(c28.145,-5.011) R43.1@28.832,-5.011 ; 28.713,-4.609 ccw(c29.082,-4.241) R43.1@29.082,-4.761 ; 28.846,-6.591 cw(c28.846,-7.146) C26.1@29.238,-6.754 ; R43.1@29.072,-5.199 cw(c28.159,-6.236) 29.54,-6.236 ; C26.1@29.111,-6.591 ccw(c29.111,-8.016) C25.2@28.103,-7.009 ; 29.134,-6.299 cw(c28.897,-6.536) C26.1@29.213,-6.646 ; 29.235,-6.245 ccw(c29.747,-6.245) 29.385,-6.607 cw(c29.624,-6.368) 29.286,-6.368 ; 29.235,-5.618 cw(c29.843,-5.618) 29.413,-5.188 ccw(c29.721,-5.495) 29.286,-5.495 ; 29.235,-5.612 ccw(c28.636,-5.612) 29.06,-5.188 cw(c28.514,-5.734) 29.286,-5.734 ; R43.1@29.27,-4.974 cw(c28.743,-5.572) 29.54,-5.572 ; R43.1@29.286,-5.011 C26.1@29.286,-6.452 ; C26.1@29.354,-6.585 cw(c29.438,-6.401) 29.235,-6.401 ; C26.1@29.385,-6.754 cw(c29.777,-7.146) 29.777,-6.591 ; C26.1@29.413,-6.655 cw(c29.882,-6.54) 29.54,-6.198 ; R43.1@29.54,-5.004 29.54,-6.198 ; 29.687,-6.591 cw(c29.687,-7.55) U3.2@30.364,-6.872 ; 29.993,-6.591 ccw(c29.993,-6.066) U3.2@30.364,-6.438 ; L1.2@24.79,-8.052 24.79,-7.392 ; L1.2@24.79,-8.052 24.79,-7.722 25.921,-6.591 C2.2@26.314,-6.591 ; L1.2@24.79,-8.052 24.854,-8.052 C2.2@26.314,-6.591 ; 24.79,-7.392 25.857,-6.325 30.099,-6.325 ; C2.2@26.314,-6.591 30.34,-6.591 30.607,-6.325 30.099,-6.325 ; C2.2@26.314,-6.591 26.581,-6.325 ; 26.581,-6.325 27.483,-6.325 ; 26.581,-6.325 27.483,-6.325 ; 27.483,-6.325 ccw(c27.483,-7.263) 26.606,-6.928 cw(c27.483,-7.263) 27.483,-6.325 ; 27.483,-6.325 30.099,-6.325 ; C25.2@27.891,-6.797 cw(c29.031,-7.936) 29.031,-6.325 ccw(c29.031,-7.936) C25.2@27.891,-6.797 ; C25.2@28.103,-7.009 cw(c29.755,-8.66) 29.755,-6.325 ccw(c29.755,-8.66) C25.2@28.103,-7.009 ; 29.235,-6.401 C26.1@29.286,-6.452 ; C26.1@29.238,-6.754 ccw(c28.202,-7.79) 28.202,-6.325 cw(c28.202,-7.79) C26.1@29.238,-6.754 ; C26.1@29.286,-6.452 29.54,-6.198 ; 30.099,-6.325 ccw(c30.099,-7.125) 29.402,-6.731 cw(c30.099,-7.125) 30.099,-6.325 ; U3.2@30.364,-6.872 ccw(c29.043,-8.194) 29.043,-6.325 cw(c29.043,-8.194) U3.2@30.364,-6.872 ; C2.2@26.046,-6.714 cw(c26.611,-6.93) 26.611,-6.325 ccw(c26.611,-6.93) C2.2@26.046,-6.714 ; C2.2@26.326,-6.821 cw(c27.047,-7.096) 27.047,-6.325 ccw(c27.047,-7.096) C2.2@26.326,-6.821 ; C25.2@27.679,-6.584 cw(c28.306,-7.212) 28.306,-6.325 ccw(c28.306,-7.212) C25.2@27.679,-6.584 ; 28.926,-6.325 cw(c28.926,-7.066) 29.45,-6.542 ccw(c28.926,-7.066) 28.926,-6.325 ; C26.1@29.141,-6.584 cw(c29.585,-6.835) 29.585,-6.325 ccw(c29.585,-6.835) C26.1@29.141,-6.584 ; 29.767,-6.325 cw(c29.767,-7.469) 30.577,-6.66 ccw(c29.767,-7.469) 29.767,-6.325
DCDC_EN: D3.1 U4.37 | length 35.5
  Top Layer w0.15: D3.1@18.028,-3.226 v1(18.593,-3.226) ; D3.1@18.188,-3.386 cw(c18.573,-3.771) v1@18.573,-3.226 ; D3.1@18.249,-3.012 ccw(c18.593,-2.843) v1(18.593,-3.226) ; v1@18.469,-3.35 ccw(c18.17,-3.648) 18.17,-3.226 ccw(c18.17,-2.803) v1@18.469,-3.102 ; v1@18.593,-3.099 v1(18.593,-3.226) ; U4.37@41.517,-4.211 42.057,-4.211 42.367,-4.521 42.901,-4.521 43.485,-4.521 v1(43.764,-4.242) v1@43.764,-4.42
  Bottom Layer w0.15: v1(18.593,-3.226) 20.701,-3.226 22.047,-1.88 34.366,-1.88 37.16,-4.674 41.351,-4.674 41.834,-4.191 41.834,-3.15 42.139,-2.845 43.205,-2.845 43.764,-3.404 v1(43.764,-4.242) ; v1@18.717,-3.35 cw(c19.015,-3.648) 19.015,-3.226 cw(c19.015,-2.803) v1@18.717,-3.102 ; v1@43.64,-4.118 ccw(c43.342,-3.819) 43.764,-3.819 ccw(c44.187,-3.819) v1@43.888,-4.118
GND: C1.1 C2.1 C3.1 C4.2 C5.1 C6.1 C10.1 C11.1 C12.1 C14.1 C15.1 C23.1 C24.2 C25.1 C26.2 C27.1 C28.2 C29.1 DS1.2 FU1.1 GND.1 P2.1 P2.3 P2.4 P3.0 P3.0/2 P3.7 P6.1 P6.3 P6.4 Q3.2 Q4.2 Q5.2 Q6.2 Q7.2 Q8.2 R3.2 R9.2 R15.1 R16.2 R30.2 R31.2 R35.2 R36.2 R37.2 R38.2 R46.2 R47.1 R49.2 U1.2 U2.2 U2.9 U3.3 U4.0
  other v1: 29.083,-9.449 20.803,-9.423 25.933,-9.423 31.191,-9.423 30.099,-9.398 27.254,-9.373 7.645,-9.246 0.965,-9.093 2.388,-9.068 6.223,-9.042 4.343,-9.017 3.581,-8.992 115.926,-8.865 71.78,-8.636 71.145,-8.611 7.976,-8.026 14.63,-7.772 17.475,-7.772 76.073,-7.645 108.001,-7.569 88.341,-7.315 101.981,-7.188 99.162,-7.137 77.267,-6.833 14.757,-6.401 95.809,-6.121 91.542,-6.096 18.593,-5.791 48.336,-5.766 48.87,-5.766 78.156,-5.766 3.378,-5.74 75.286,-5.715 47.955,-5.486 12.725,-5.436 73.939,-5.41 80.264,-5.385 48.362,-5.232 48.895,-5.232 9.627,-4.978 10.897,-4.978 1.321,-4.877 2.87,-4.826 3.937,-4.826 7.391,-4.775 8.23,-4.775 5.207,-4.699 6.604,-4.699 27.33,-4.369 25.197,-4.343 23.647,-4.318 72.466,-4.115 38.278,-4.039 39.624,-4.039 37.643,-3.505 38.938,-3.505 40.31,-3.48 31.521,-3.404 76.302,-3.404 44.831,-3.175 81.128,-3.048 91.516,-2.769 44.806,-2.413 75.362,-2.388 72.492,-2.184 71.933,-1.753 47.955,-1.702 3.632,-1.6 101.625,-1.473 104.826,-1.473 99.365,-1.448 106.528,-1.397 45.288,-1.372 44.755,-1.346 6.706,-1.321 33.147,-1.321 33.884,-1.321 30.531,-1.295 31.064,-1.295 71.399,-1.295 25.044,-1.245 48.463,-1.219 7.976,-1.194 115.799,-1.168 109.22,-1.143 5.893,-1.092 3.632,-0.914 2.946,-0.686 1.143,-0.635 7.925,-0.559
GREEN: R34.2 U4.8 | length 64.3
  Top Layer w0.127: v1(68.478,-7.163) v1(74.092,-7.163) ; v1@68.61,-7.295 cw(c68.929,-7.613) 68.929,-7.163 cw(c68.929,-6.713) v1@68.61,-7.031 ; v1@73.96,-7.295 ccw(c73.642,-7.613) 73.642,-7.163 ccw(c73.642,-6.713) v1@73.96,-7.031 ; R34.2@79.418,-2.37 cw(c79.093,-2.695) 79.553,-2.695 cw(c80.013,-2.695) R34.2@79.688,-2.37 ; v1@79.421,-2.891 ccw(c79.103,-2.572) 79.553,-2.572 ccw(c80.003,-2.572) v1@79.685,-2.891 ; v1(79.553,-3.023) R34.2@79.553,-2.159
  Top Layer w0.15: v1(33.503,-5.817) 33.503,-5.791 34.658,-4.635 34.658,-2.984 36.347,-1.295 37.637,-1.295 37.967,-1.626 U4.8@37.967,-1.854 ; v1@33.503,-5.642 ccw(c33.503,-5.28) 33.758,-5.536 ; v1@33.678,-5.817 cw(c34.161,-5.817) 33.819,-5.474
  Bottom Layer w0.127: 34.364,-5.942 35.027,-6.604 40.132,-6.604 41.173,-7.645 49.911,-7.645 51.283,-6.274 66.218,-6.274 67.107,-7.163 v1(68.478,-7.163) ; v1@68.347,-7.295 ccw(c68.028,-7.613) 68.028,-7.163 ccw(c68.028,-6.713) v1@68.347,-7.031 ; v1(74.092,-7.163) 75.413,-7.163 v1(79.553,-3.023) ; v1@74.224,-7.295 cw(c74.542,-7.613) 74.542,-7.163 cw(c74.542,-6.713) v1@74.224,-7.031 ; v1@79.366,-3.023 cw(c78.916,-3.023) 79.234,-3.341 cw(c79.553,-3.659) v1@79.553,-3.209
  Bottom Layer w0.15: v1(33.503,-5.817) 34.239,-5.817 34.364,-5.942 ; v1@33.626,-5.94 cw(c33.925,-6.239) 33.925,-5.817 cw(c33.925,-5.394) v1@33.626,-5.693
HO1: R39.2 U4.29 | length 17.8
  Top Layer w0.127: U4.29@40.327,-7.731 cw(c40.231,-7.827) 40.367,-7.827 cw(c40.503,-7.827) U4.29@40.407,-7.731 ; U4.29@40.367,-7.112 U4.29@40.367,-7.361 40.367,-7.88 40.64,-8.153 52.248,-8.153 55.538,-8.153 56.082,-7.61 R39.2@56.082,-7.585 ; 55.713,-7.979 cw(c56.082,-8.347) R39.2@56.082,-7.826 ; 55.774,-7.917 ccw(c55.493,-7.636) R39.2@55.891,-7.636
HO2: R17.2 U4.25 | length 26.3
  Top Layer w0.127: U4.25@38.727,-7.731 cw(c38.631,-7.827) 38.767,-7.827 cw(c38.903,-7.827) U4.25@38.807,-7.731 ; U4.25@38.767,-7.137 U4.25@38.767,-7.361 38.767,-7.925 38.633,-8.058 38.633,-8.636 38.862,-8.865 60.757,-8.865 61.443,-8.179 R17.2@61.443,-7.585 ; R17.2@61.308,-7.796 cw(c60.983,-8.121) 61.443,-8.121 cw(c61.903,-8.121) R17.2@61.577,-7.796